# EAGLE board Pendulum-Lamp Eagle Board - Laser Array (EAGLE 8.6.3)
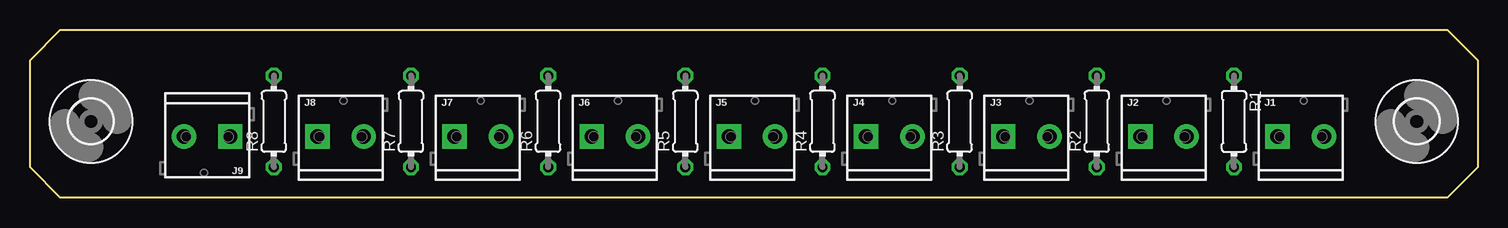
[diagram p0: board, top side]
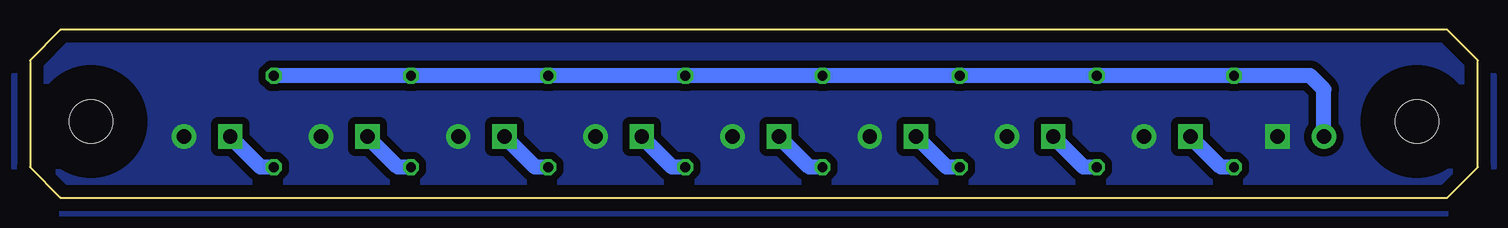
[diagram p1: board, bottom side, seen from below]

Size 120.65 x 13.97 mm. Coordinates in mm from the lower left corner, seen from the top.
Outline: 0,2.54 0,11.43 2.54,13.97 118.11,13.97 120.65,11.43 120.65,2.54 118.11,0 2.54,0 0,2.54
Copper layers (1*16): Top 0.035mm / dielectric 1.5mm / Bottom 0.035mm
Design rules "default": minimum track width 6mil, minimum drill 0.35mm, track to track 6mil, track to pad 6mil, pad to pad 6mil, via to via 6mil, smd to smd 6mil, copper to edge 40mil, drill to drill 6mil, minimum pad ring 10mil, minimum via ring 8mil, stop-mask expansion 4mil, vias tented up to drill 0mil, thermal gap 10mil

## Footprints (pad centres in the part's own frame; a part is rotated, then mirrored left to right if it is on the bottom)
3,6 = hole 3.6: 0,0
SCREWTERMINAL-3.5MM-2_LOCK = drill 1.2 pad 2.032 square: 1 -0.178,0 | drill 1.2 pad 2.032: 2 3.678,0
0204/7 = drill 0.813 octagon: 1 -3.81,0; 2 3.81,0

## Placement (x,y rotation side)
H1  MOUNT-HOLE3.6  [3,6]  5.08,6.35 0 top
H2  MOUNT-HOLE3.6  [3,6]  115.57,6.35 0 top
J1  [SCREWTERMINAL-3.5MM-2_LOCK]  104.14,5.08 0 top
J2  [SCREWTERMINAL-3.5MM-2_LOCK]  92.71,5.08 0 top
J3  [SCREWTERMINAL-3.5MM-2_LOCK]  81.28,5.08 0 top
J4  [SCREWTERMINAL-3.5MM-2_LOCK]  69.85,5.08 0 top
J5  [SCREWTERMINAL-3.5MM-2_LOCK]  58.42,5.08 0 top
J6  [SCREWTERMINAL-3.5MM-2_LOCK]  46.99,5.08 0 top
J7  [SCREWTERMINAL-3.5MM-2_LOCK]  35.56,5.08 0 top
J8  [SCREWTERMINAL-3.5MM-2_LOCK]  24.13,5.08 0 top
J9  [SCREWTERMINAL-3.5MM-2_LOCK]  16.51,5.08 180 top
R1  [0204/7]  100.33,6.35 270 top
R2  [0204/7]  88.9,6.35 90 top
R3  [0204/7]  77.47,6.35 90 top
R4  [0204/7]  66.04,6.35 90 top
R5  [0204/7]  54.61,6.35 90 top
R6  [0204/7]  43.18,6.35 90 top
R7  [0204/7]  31.75,6.35 90 top
R8  [0204/7]  20.32,6.35 90 top

## Library data of the parts
H1 H2 = holes
J1-J9 = SparkFun-Connectors; PROD_ID: CONN-08399
R1-R8 = rcl; SPICEPREFIX: R

## Nets
GND: J1.2 J2.2 J3.2 J4.2 J5.2 J6.2 J7.2 J8.2 J9.1
LVCC: J9.2 R1.1 R2.2 R3.2 R4.2 R5.2 R6.2 R7.2 R8.2
N$1: J1.1 R1.2
N$2: J2.1 R2.1
N$3: J3.1 R3.1
N$4: J4.1 R4.1
N$5: J5.1 R5.1
N$6: J6.1 R6.1
N$7: J7.1 R7.1
N$8: J8.1 R8.1

## Tracks (layer width: path | path; a pad name or v marks a point on that pad's centre or on a via)
GND
  pour Bottom (isolate 0.61, no thermals): 2.54,13.97 118.11,13.97 121.92,10.16 121.92,2.54 118.11,-1.27 2.54,-1.27 -1.27,2.54 -1.27,10.16
LVCC
  Bottom 1.27: J9.2 12.83,9.02 13.97,10.16 R8.2 R7.2 R6.2 R5.2 R4.2 R3.2 R2.2 R1.1
N$1
  Bottom 1.27: R1.2 101.42,2.54 J1.1
N$2
  Bottom 1.27: R2.1 89.99,2.54 J2.1
N$3
  Bottom 1.27: R3.1 78.56,2.54 J3.1
N$4
  Bottom 1.27: R4.1 67.13,2.54 J4.1
N$5
  Bottom 1.27: R5.1 55.7,2.54 J5.1
N$6
  Bottom 1.27: R6.1 44.27,2.54 J6.1
N$7
  Bottom 1.27: R7.1 32.84,2.54 J7.1
N$8
  Bottom 1.27: R8.1 21.41,2.54 J8.1